# Altium PCB PD.PcbDoc
Units mil, origin at the board's own origin, x right, y up, seen from the top; angles counter-clockwise.
Board outline 846.46 x 669.29 mil, 2 copper layers (Top Layer, Bottom Layer); 3 components, 3 nets, 8 pads, 21 vias.
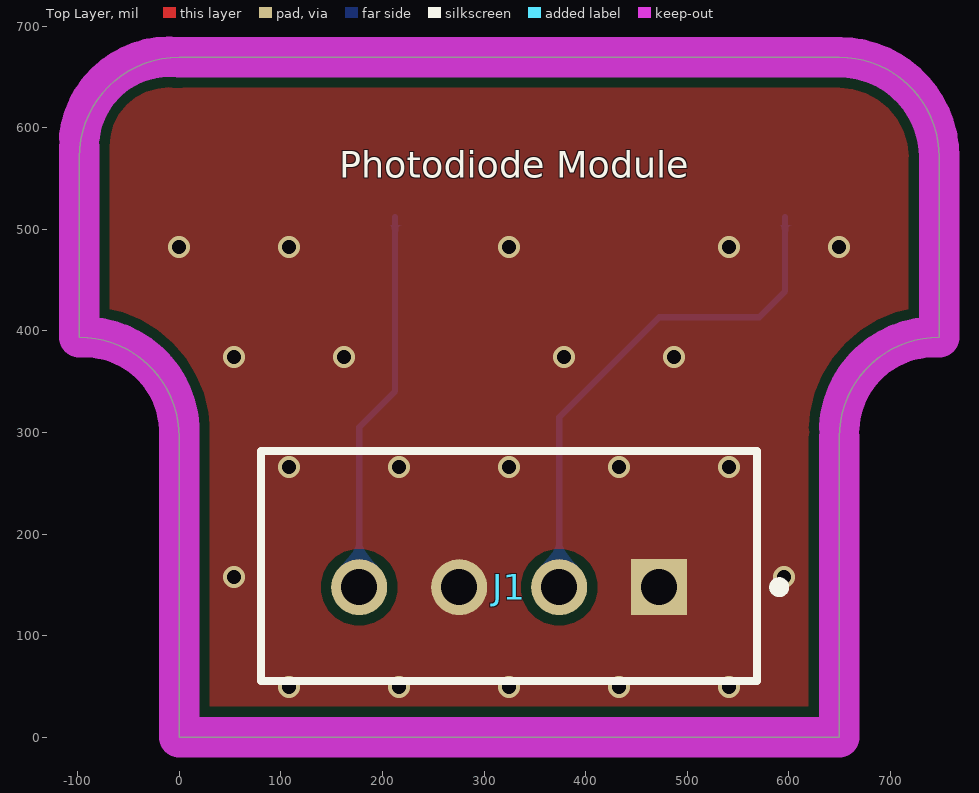
[diagram p0: Top Layer view]
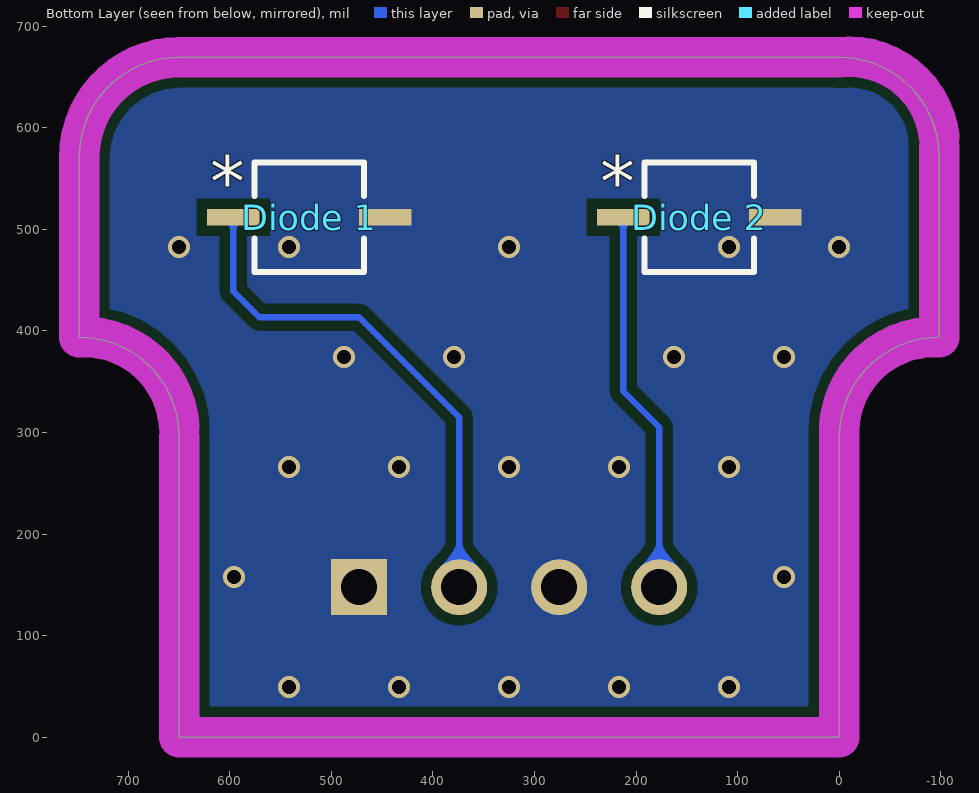
[diagram p1: Bottom Layer view, seen from below]

## Layer stack, top to bottom
Top Solder: solder mask 0.4, Solder Resist, Dk 3.5
Top Layer: signal copper 1.4
Dielectric 1: dielectric 12.6, FR-4, Dk 4.8
Bottom Layer: signal copper 1.4
Bottom Solder: solder mask 0.4, Solder Resist, Dk 3.5

## Board outline
-98.43,393.7 cw(c-98.43,295.28) 0,295.28 0,0 649.61,0 649.61,295.28 cw(c748.03,295.28) 748.03,393.7 748.03,570.87 ccw(c649.61,570.87) 649.61,669.29 0,669.29 ccw(c0,570.87) -98.43,570.87

## Design rules (kind name [scope] priority, off if disabled: settings)
Clearance [All] p1: gap=10 ignorepadtopadclearanceinfootprint=FALSE
PolygonConnect [All] p1: connectstyle=Direct reliefconductorwidth=10 reliefentries=4 polygonreliefangle="90 Angle" airgapwidth=10
RoutingVias [All] p1: holewidth=28 width=50 viastyle="Through Hole" minholewidth=28 minwidth=50 maxholewidth=28 maxwidth=50
SolderMaskExpansion [All] p1: expansion=4 istentingtop=FALSE
SupplyNets "Schematic Supply Nets" [InNet('GND')] p1: voltage=0.000
Width [All] p1: maxlimit=6 minlimit=6 preferedwidth=6
30 further rules are at their usual default settings.

## Components (designator, comment, footprint, x,y, rotation, side; value= is the part's Value field where it differs from the comment)
"Diode 1" "VEMD2020X01" 6p544-5383p02-4_VIS 521.65,511.81 r180 bottom
"Diode 2" "VEMD2020X01" 6p544-5383p02-4_VIS 137.8,511.81 r180 bottom
J1 "B4B-XH-A(LF)(SN)" FP-B4B-XH-A_LF_SN-MFG 324.8,168.31 r0 top

## Footprints (in the part's own frame and the unit in brackets; to place one, negate y for a bottom-side part, rotate by r counter-clockwise, add the part's x,y. Pads: shape width x height; smd on the part's side, far side on the other; paste and mask are expansions set on the pad)
6p544-5383p02-4_VIS [mil]
  rect 51.5x16 smd paste+0 mask+0: 1(-74.75,0) 2(74.75,0)
  silkscreen extent -54,-54 54,54
FP-B4B-XH-A_LF_SN-MFG [mm]
  rect 1.4x1.4 hole 0.9 paste-2539.97 mask+0: 1(3.75,-0.525)
  round 1.4 hole 0.9 paste-2539.97 mask+0: 2(1.25,-0.525) 3(-1.25,-0.525) 4(-3.75,-0.525)
  silkscreen extent -6.2,-2.88 6.88,2.88, body extent -6.3,-2.98 6.3,2.98, height 0.25

## Part data
"Diode 1" "Diode 2": "No Description Available", Mfr_Name=Vishay, RefDes=RefDes, Type=Type
J1: library part CMP-17439-000250-1, "CONN HEADER VERT 4POS 2.5MM", Color=Natural, Contact Resistance=20mR, Current Rating=3A, Flammability Rating="UL94 V-0", Housing Color=White, Insulation Resistance=1GR, Max Operating Temperature=85°C, Max Voltage Rating (AC)=250V, Min Operating Temperature=-25°C, Package Quantity=500, Connector Type=Header, Contact Finish - Mating=TIN, Contact Material=Brass, Contact Plating=Tin, Contact Shape=Square, Contact Type="Male Pin", Depth=5.75mm, Fastening Type=Detent, Gender=Male, Housing Material=Polyamide, Insulation Color=Natural, Insulation Material=Nylon, Lead Free="Lead Free", Lead Pitch=2.5mm, Length=12.4mm, Mated Stacking Heights=9.8mm, Material=Polyamide, Max Current Rating=3A, Max Voltage Rating (DC)=250V, Mount="Through Hole", Number Of Contacts=4, Number of Positions=4, Number of Rows=1, Orientation=Straight, Packaging=Bulk, Pitch=2.5mm, REACH SVHC="No SVHC", Series=XH, Termination=Solder, Voltage Rating=250V, Voltage Rating (AC)=250V, Wire/Cable Gauge=22AWG

## Via types
v1: diameter 21.65, hole 13.78, Top Layer to Bottom Layer, 21 vias

## Nets (pads, with @x,y where several pads share a name; then routed paths per layer and width w, separated by ;. In a path a pad name is that pad's centre, name@x,y a point inside that pad or via, vN(x,y) a via of type N, cw(c..) or ccw(c..) an arc to the next point about the centre after c; other vN are vias at no path point)
"Diode 1 Cathode": "Diode 1.1" J1.2 | length 513.9
  Bottom Layer w6: J1.2 374.02,314.96 472.44,413.39 570.87,413.39 596.4,438.92 596.4,511.81
"Diode 2 Cathode": "Diode 2.1" J1.4 | length 378.8
  Bottom Layer w6: J1.4 177.17,305.12 212.55,340.5 212.55,511.81
GND: "Diode 1.2" "Diode 2.2" J1.1 J1.3
  other v1: 108.27,49.21 216.53,49.21 324.8,49.21 433.07,49.21 541.34,49.21 54.13,157.48 595.47,157.48 108.27,265.75 216.53,265.75 324.8,265.75 433.07,265.75 541.34,265.75 54.13,374.02 162.4,374.02 378.94,374.02 487.2,374.02 0,482.28 108.27,482.28 324.8,482.28 541.34,482.28 649.61,482.28

## Polygon pours and split planes (outlines as drawn)
GND on Top Layer "GND" (solid, remove dead copper, pour order 1): -98.43,669.29 -98.43,305.12 -9.84,305.12 0,295.28 0,0 649.61,0 649.61,295.28 708.66,295.28 757.87,344.49 757.87,669.29
GND on Bottom Layer "GND" (solid, remove dead copper, pour order 0): -98.43,305.12 -9.84,305.12 0,295.28 0,0 649.61,0 649.61,295.28 708.66,295.28 757.87,344.49 757.87,669.29 -98.43,669.29

## Keep-outs
Keep-Out Layer:
  lines w40: -98.43,580.71 -98.43,393.7 cw(c-93.5,300.2) 0,305.12 0,0 649.61,0 649.61,295.28 ; -98.43,590.55 cw(c-9.84,580.71) 0,669.29 649.61,669.29 cw(c649.61,570.87) 748.03,570.87 748.03,393.7 ccw(c743.11,300.2) 649.61,305.12

## Silkscreen, mask and mechanical layers (free items; w line width, h text height)
Top Overlay:
  text "Photodiode Module" at 157.48,541.8 h45
Mechanical 1:
  lines w10: -98.43,393.7 cw(c-98.43,295.28) 0,295.28 0,0 68.9,0 649.61,0 649.61,295.28 cw(c748.03,295.28) 748.03,393.7 748.03,570.87 ccw(c649.61,570.87) 649.61,669.29 0,669.29 ccw(c0,570.87) -98.43,570.87 -98.43,393.7

## Text inside footprints (layer, text, board x,y; h text height)
"Diode 1": Mechanical 13 "*" at 568.15,507.81 h50; Bottom Overlay "*" at 618.9,522.81 h50
"Diode 2": Mechanical 13 "*" at 184.3,507.81 h50; Bottom Overlay "*" at 235.05,522.81 h50